# EAGLE board pre_auto (EAGLE 7.2.0)

Size 87.3 x 80 mm. Coordinates in mm from the lower left corner, seen from the top.
Outline: 0,0 87.3,0 87.3,80 0,80 0,0
Copper layers (1*16): Top 0.035mm / dielectric 1.5mm / Bottom 0.035mm
Design rules "default": minimum track width 10mil, minimum drill 24mil, track to track 8mil, track to pad 8mil, pad to pad 8mil, via to via 8mil, smd to smd 8mil, copper to edge 40mil, drill to drill 8mil, minimum pad ring 10mil, minimum via ring 8mil, stop-mask expansion 4mil, vias tented up to drill 0mil, thermal gap 10mil

## Footprints (pad centres in the part's own frame; a part is rotated, then mirrored left to right if it is on the bottom)
E2,5-5 = drill 0.813 pad 1.6: + -1.27,0 | drill 0.813 pad 1.6 octagon: - 1.27,0
C050-045X075 = drill 0.813 octagon: 1 -2.54,0; 2 2.54,0
DIL08 = drill 0.813 pad 1.27: 1 -3.81,-3.81; 2 -1.27,-3.81; 3 1.27,-3.81; 4 3.81,-3.81; 5 3.81,3.81; 6 1.27,3.81; 7 -1.27,3.81; 8 -3.81,3.81
TO220H = drill 1.118 long: 1 -2.54,-10.16; 2 0,-10.16; 3 2.54,-10.16 | hole 3.302: 0,4.826
1X02 = drill 1.016 long: 1 -1.27,0; 2 1.27,0
1X14 = drill 1.016 long: 1 -16.51,0; 2 -13.97,0; 3 -11.43,0; 4 -8.89,0; 5 -6.35,0; 6 -3.81,0; 7 -1.27,0; 8 1.27,0; 9 3.81,0; 10 6.35,0; 11 8.89,0; 12 11.43,0; 13 13.97,0; 14 16.51,0
1X08 = drill 1.016 long: 1 -8.89,0; 2 -6.35,0; 3 -3.81,0; 4 -1.27,0; 5 1.27,0; 6 3.81,0; 7 6.35,0; 8 8.89,0
1X12 = drill 1.016 long: 1 -13.97,0; 2 -11.43,0; 3 -8.89,0; 4 -6.35,0; 5 -3.81,0; 6 -1.27,0; 7 1.27,0; 8 3.81,0; 9 6.35,0; 10 8.89,0; 11 11.43,0; 12 13.97,0
0207/10 = drill 0.813 octagon: 1 -5.08,0; 2 5.08,0
CA6V = drill 1.016 long: A -2.54,-2.54; E 2.54,-2.54; S 0,2.54
22-23-2031 = drill 1 long: 1 -2.54,0; 2 0,0; 3 2.54,0

## Placement (x,y rotation side)
C2  1u  [E2,5-5]  44.45,35.56 180 top
C3  10u  [E2,5-5]  24.13,30.48 180 top
C4  1u  [E2,5-5]  77.47,58.42 90 top
C5  1u  [E2,5-5]  66.04,59.69 270 top
C6  1u  [C050-045X075]  40.64,20.32 90 top
C7  1u  [C050-045X075]  27.94,12.7 270 top
C8  0.1u  [C050-045X075]  40.64,10.16 270 top
C9  0.1u  [C050-045X075]  63.5,10.16 90 top
C10  10u  [E2,5-5]  24.13,48.26 180 top
C11  2.2u  [C050-045X075]  50.8,40.64 0 top
C12  2.2u  [C050-045X075]  50.8,30.48 180 top
IC1  LM741P  [DIL08]  34.29,36.83 270 top
IC2  LM741P  [DIL08]  34.29,49.53 270 top
IC3  317T  [TO220H]  50.8,71.12 0 top
IC4  337T  [TO220H]  63.5,10.16 90 top
IC5  317T  [TO220H]  17.78,71.12 0 top
JP1  [1X02]  43.18,26.67 270 top
JP2  [1X14]  66.04,35.56 270 top
JP3  [1X14]  73.66,35.56 90 top
JP4  [1X08]  58.42,30.48 270 top
JP5  [1X12]  81.28,33.02 270 top
R1  2200  [0207/10]  68.58,66.04 0 top
R2  47k  [0207/10]  46.99,48.26 180 top
R3  33k  [0207/10]  30.48,20.32 180 top
R4  [0207/10]  7.62,45.72 90 top
R5  220  [0207/10]  12.7,55.88 180 top
R6  33k  [0207/10]  33.02,58.42 180 top
R7  220  [0207/10]  48.26,55.88 180 top
R8  33k  [0207/10]  55.88,50.8 270 top
R9  [0207/10]  38.1,73.66 0 top
R10  220  [0207/10]  68.58,71.12 180 top
R11  120  [0207/10]  33.02,7.62 270 top
R12  [0207/10]  36.83,7.62 90 top
R13  5k  [CA6V]  15.24,27.94 0 top
R14  5k  [CA6V]  15.24,45.72 180 top
X2  22-23-2031  [22-23-2031]  50.8,10.16 180 top

## Library data of the parts
C2-C12 = rcl
IC1-IC5 = linear
JP1-JP5 = pinhead
R1-R12 = resistor
R13 R14 = pot
X2 = con-molex; MF: MOLEX; MPN: 22-23-2031; OC_FARNELL: 1462950; OC_NEWARK: 30C0862

## Nets
+5V: C5.+ IC3.2 JP3.13 JP3.14 R1.2 R10.1
+10V: C4.+ C8.1 IC1.7 IC2.7 IC3.3 IC5.2 R5.1
-10V: C7.1 IC1.4 IC2.4 IC4.3 R11.1
AGND: C4.- C5.- C6.2 C7.2 C8.2 C9.2 C11.1 C12.2 JP1.2 JP2.2 JP2.5 R2.1 R4.1 R9.1 R12.2 R13.S R14.S X2.2
DGND: JP2.14
N$1: IC1.6 IC2.3 R3.1
N$2: C2.+ JP1.1 R1.1
N$3: C2.- IC1.3 R2.2
N$4: C3.+ IC1.2 R3.2
N$5: IC2.6 R6.1 R7.2
N$6: C10.+ IC2.2 R6.2
N$7: JP2.1 R7.1 R8.1
N$8: IC5.1 R4.2 R5.2
N$9: IC3.1 R9.2 R10.2
N$10: IC4.1 R11.2 R12.1
N$11: C3.- R13.A
N$12: C6.1 IC4.2 X2.3
N$13: C9.1 IC5.3 X2.1
N$14: C10.- R14.A
N$15: C11.2 JP2.3
N$16: C12.1 JP2.4 R8.2
N$18: JP2.13 JP4.8
N$19: JP2.12 JP4.7
N$20: JP2.11 JP4.6
N$21: JP2.10 JP4.5
N$22: JP2.9 JP4.4
N$23: JP2.8 JP4.3
N$24: JP2.7 JP4.2
N$25: JP2.6 JP4.1
N$26: JP3.1 JP5.12
N$27: JP3.2 JP5.11
N$28: JP3.3 JP5.10
N$29: JP3.4 JP5.9
N$30: JP3.5 JP5.8
N$31: JP3.6 JP5.7
N$32: JP3.7 JP5.6
N$33: JP3.8 JP5.5
N$34: JP3.9 JP5.4
N$35: JP3.10 JP5.3
N$36: JP3.11 JP5.2
N$37: JP3.12 JP5.1

## Tracks (layer width: path | path; a pad name or v marks a point on that pad's centre or on a via)
+5V  (5 unrouted)
+10V  (6 unrouted)
-10V  (4 unrouted)
AGND  (17 unrouted)
N$1  (2 unrouted)
N$2  (2 unrouted)
N$3  (2 unrouted)
N$4  (2 unrouted)
N$5  (2 unrouted)
N$6  (2 unrouted)
N$7  (2 unrouted)
N$8  (2 unrouted)
N$9  (2 unrouted)
N$10  (2 unrouted)
N$11  (1 unrouted)
N$12  (2 unrouted)
N$13  (2 unrouted)
N$14  (1 unrouted)
N$15  (1 unrouted)
N$16  (2 unrouted)
N$18  (1 unrouted)
N$19  (1 unrouted)
N$20  (1 unrouted)
N$21  (1 unrouted)
N$22  (1 unrouted)
N$23  (1 unrouted)
N$24  (1 unrouted)
N$25  (1 unrouted)
N$26  (1 unrouted)
N$27  (1 unrouted)
N$28  (1 unrouted)
N$29  (1 unrouted)
N$30  (1 unrouted)
N$31  (1 unrouted)
N$32  (1 unrouted)
N$33  (1 unrouted)
N$34  (1 unrouted)
N$35  (1 unrouted)
N$36  (1 unrouted)
N$37  (1 unrouted)